# Altium PCB PCBFinalDesignCurrentMirror.PcbDoc
Units mm, origin at the board's own origin, x right, y up, seen from the top; angles counter-clockwise.
Board outline 44.45 x 53.21 mm, 4 copper layers (Top Layer, Layer 1, Layer 2, Bottom Layer), stack 0.603 mm thick; 36 components, 29 nets, 185 pads, 51 vias.
Unrouted connection lines stored in the file: 33.
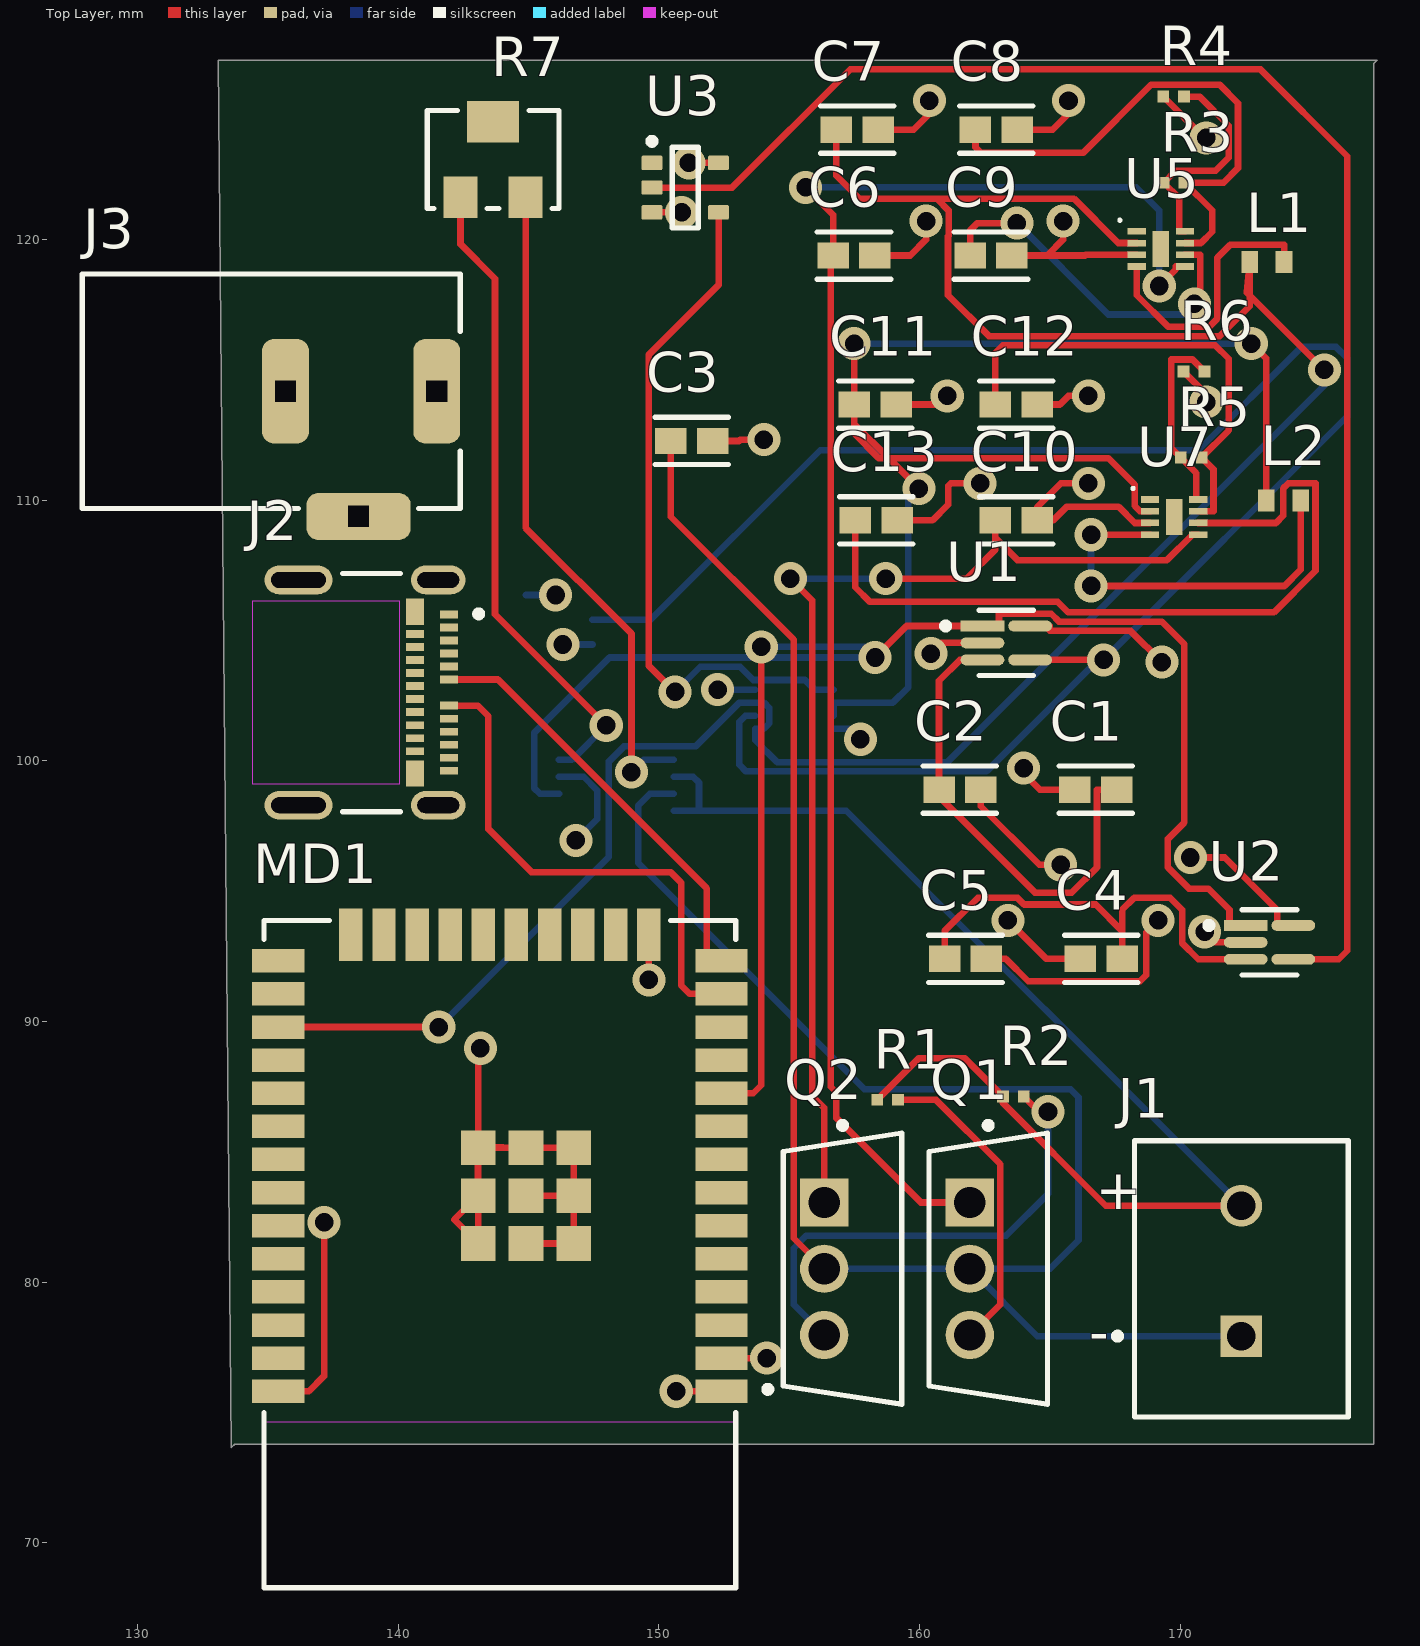
[diagram p0: Top Layer view]
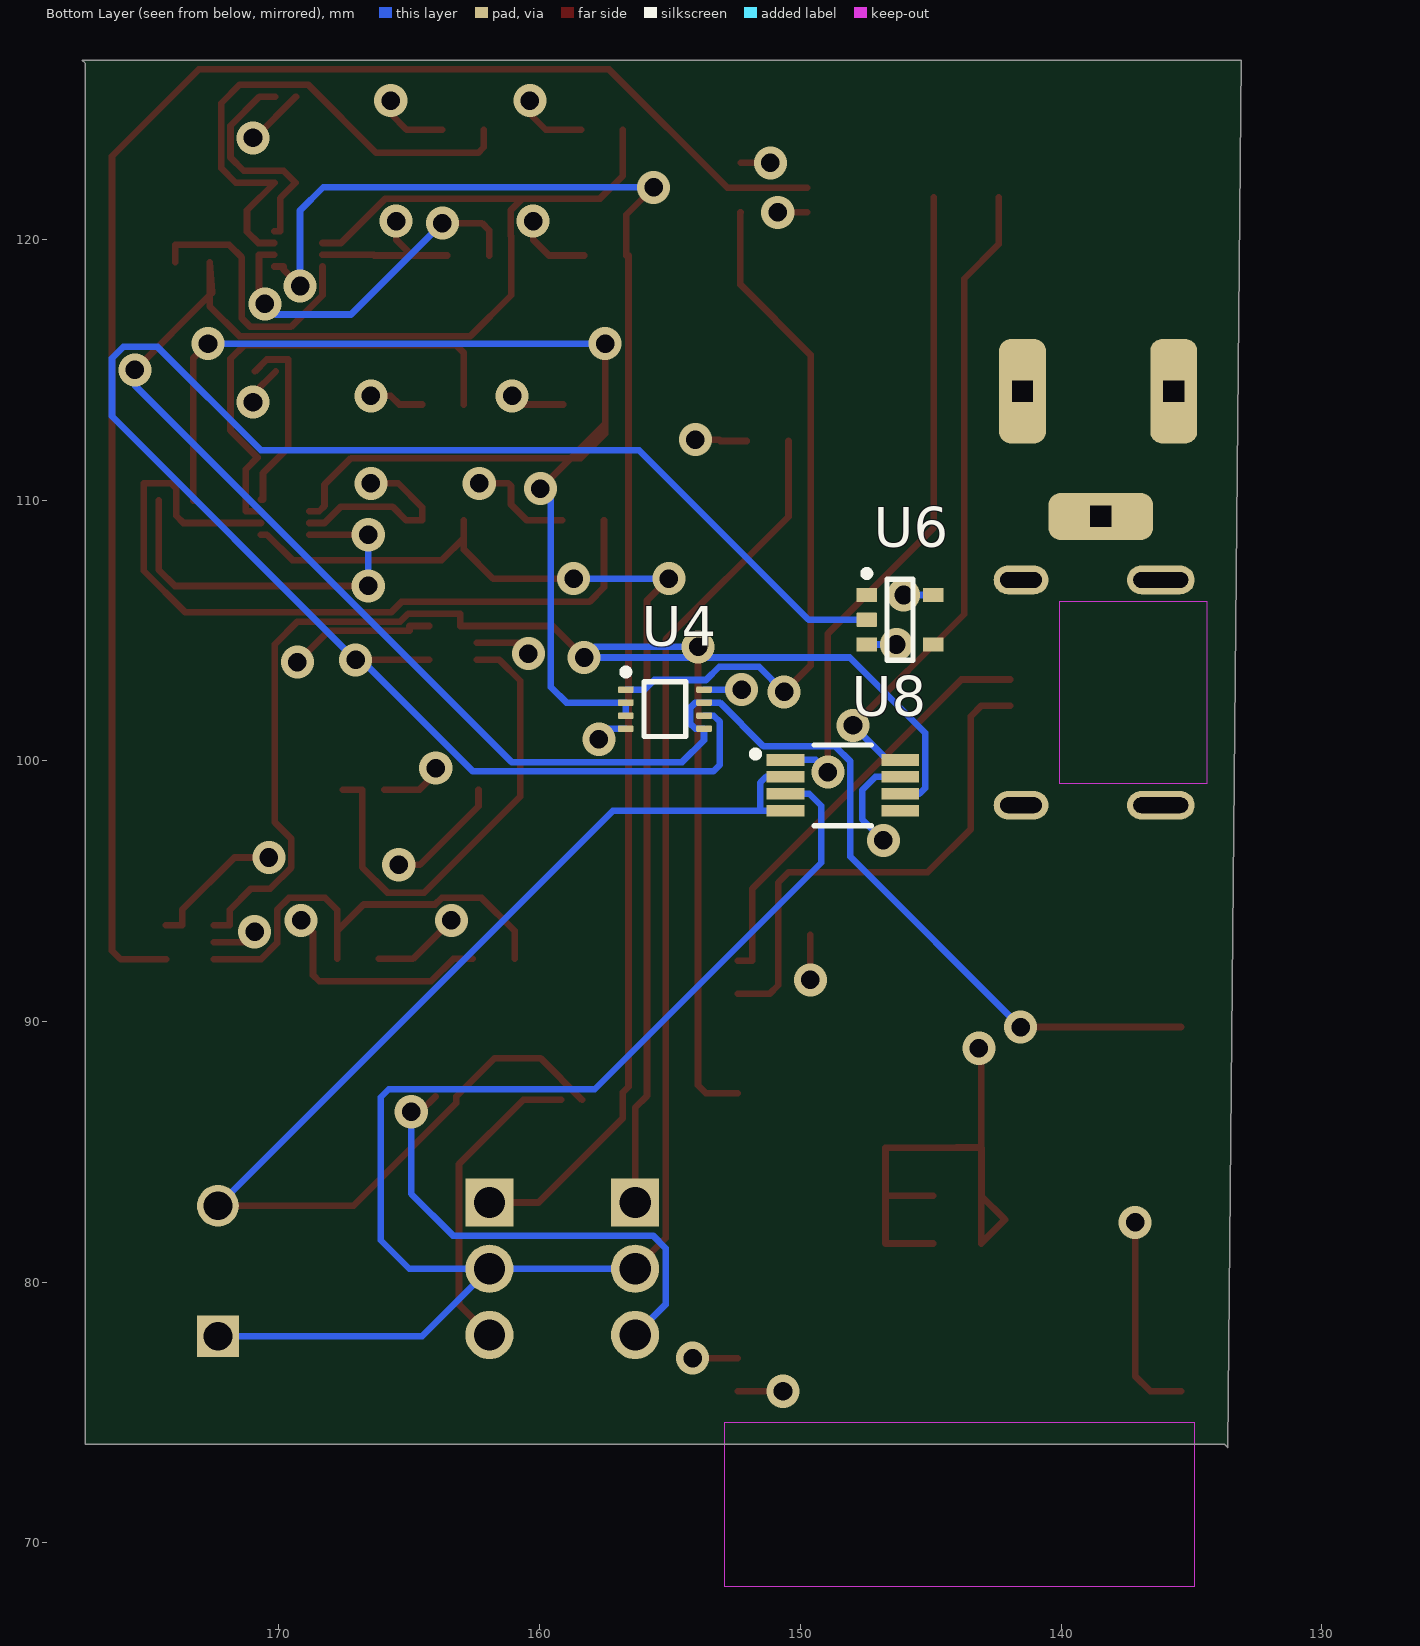
[diagram p1: Bottom Layer view, seen from below]
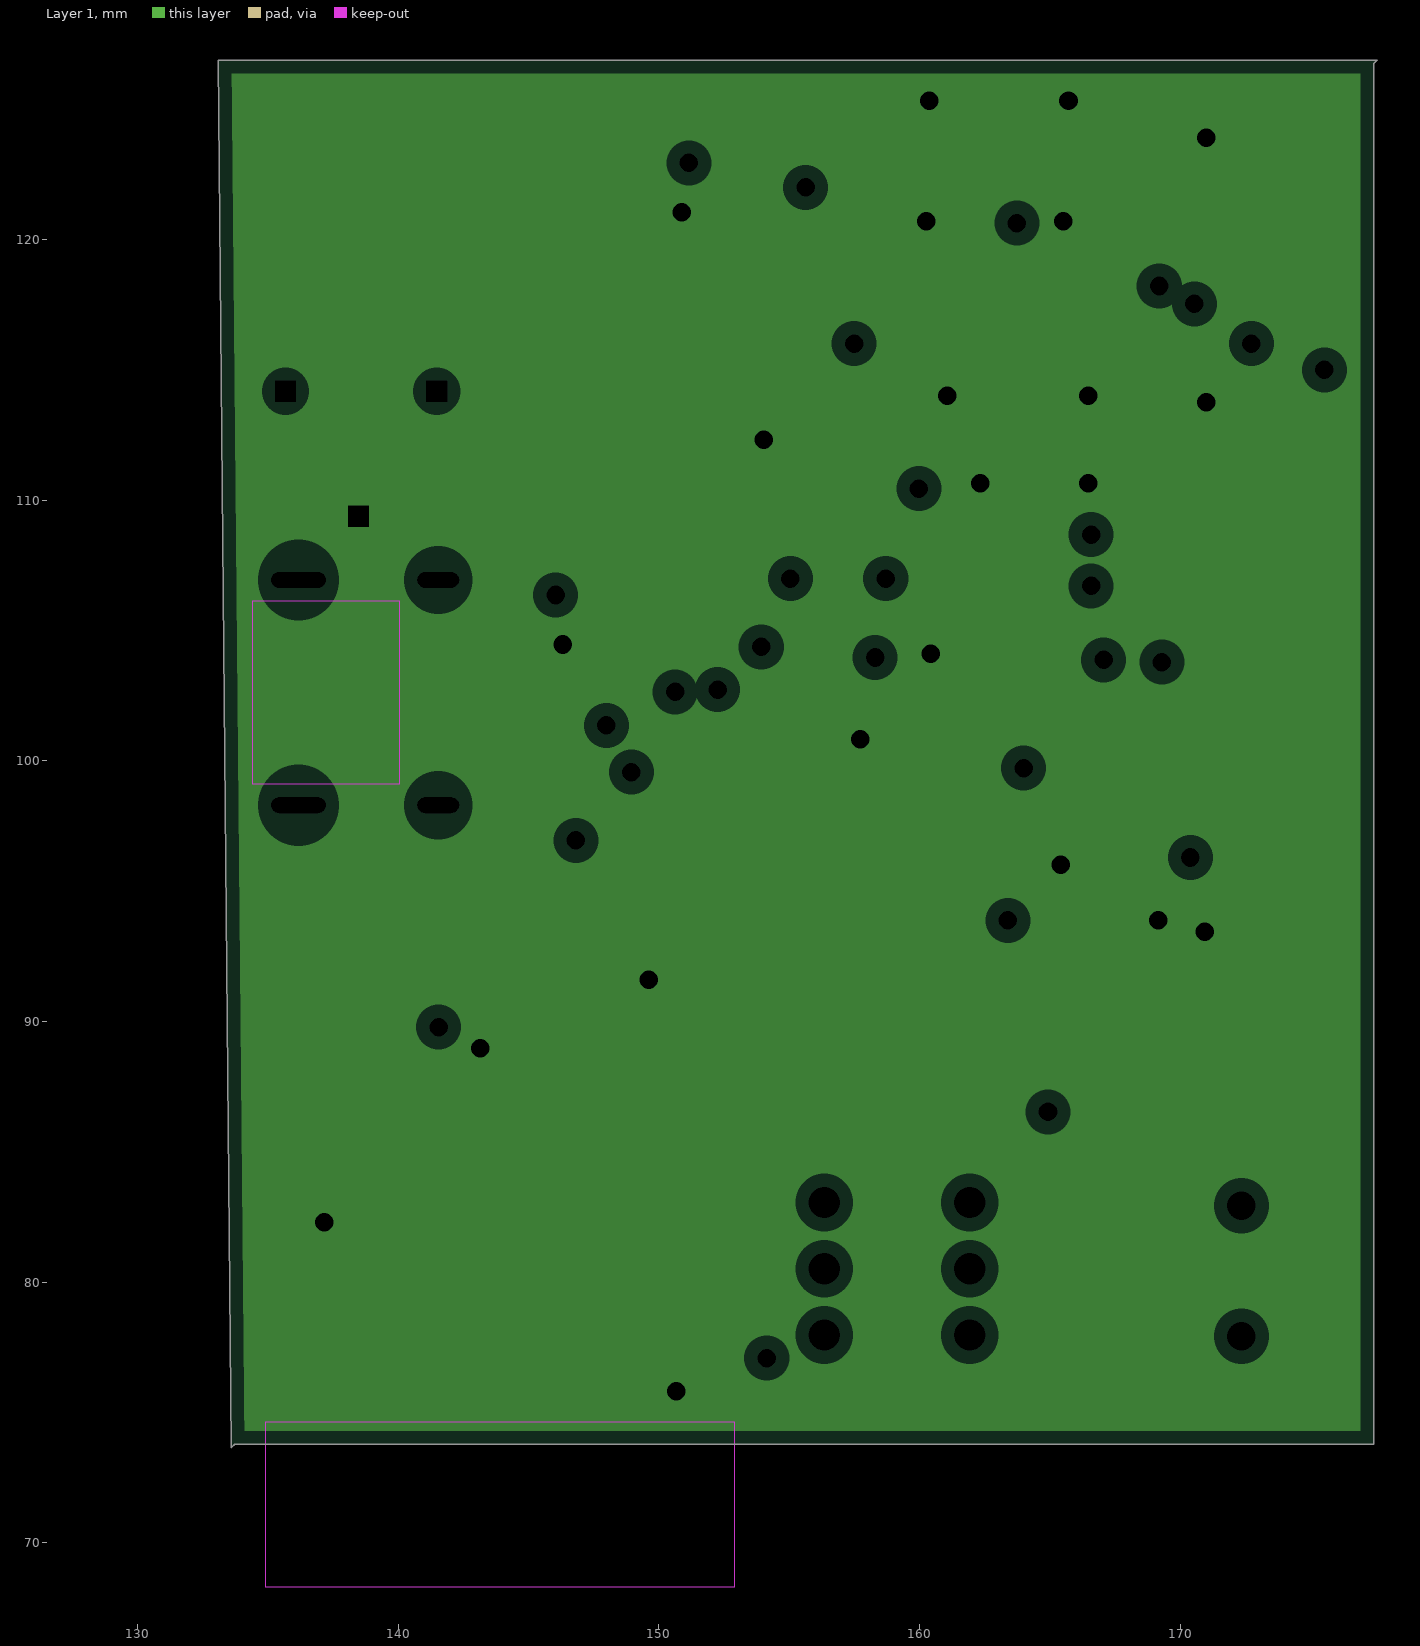
[diagram p2: Layer 1, clearances drawn from the general rule]
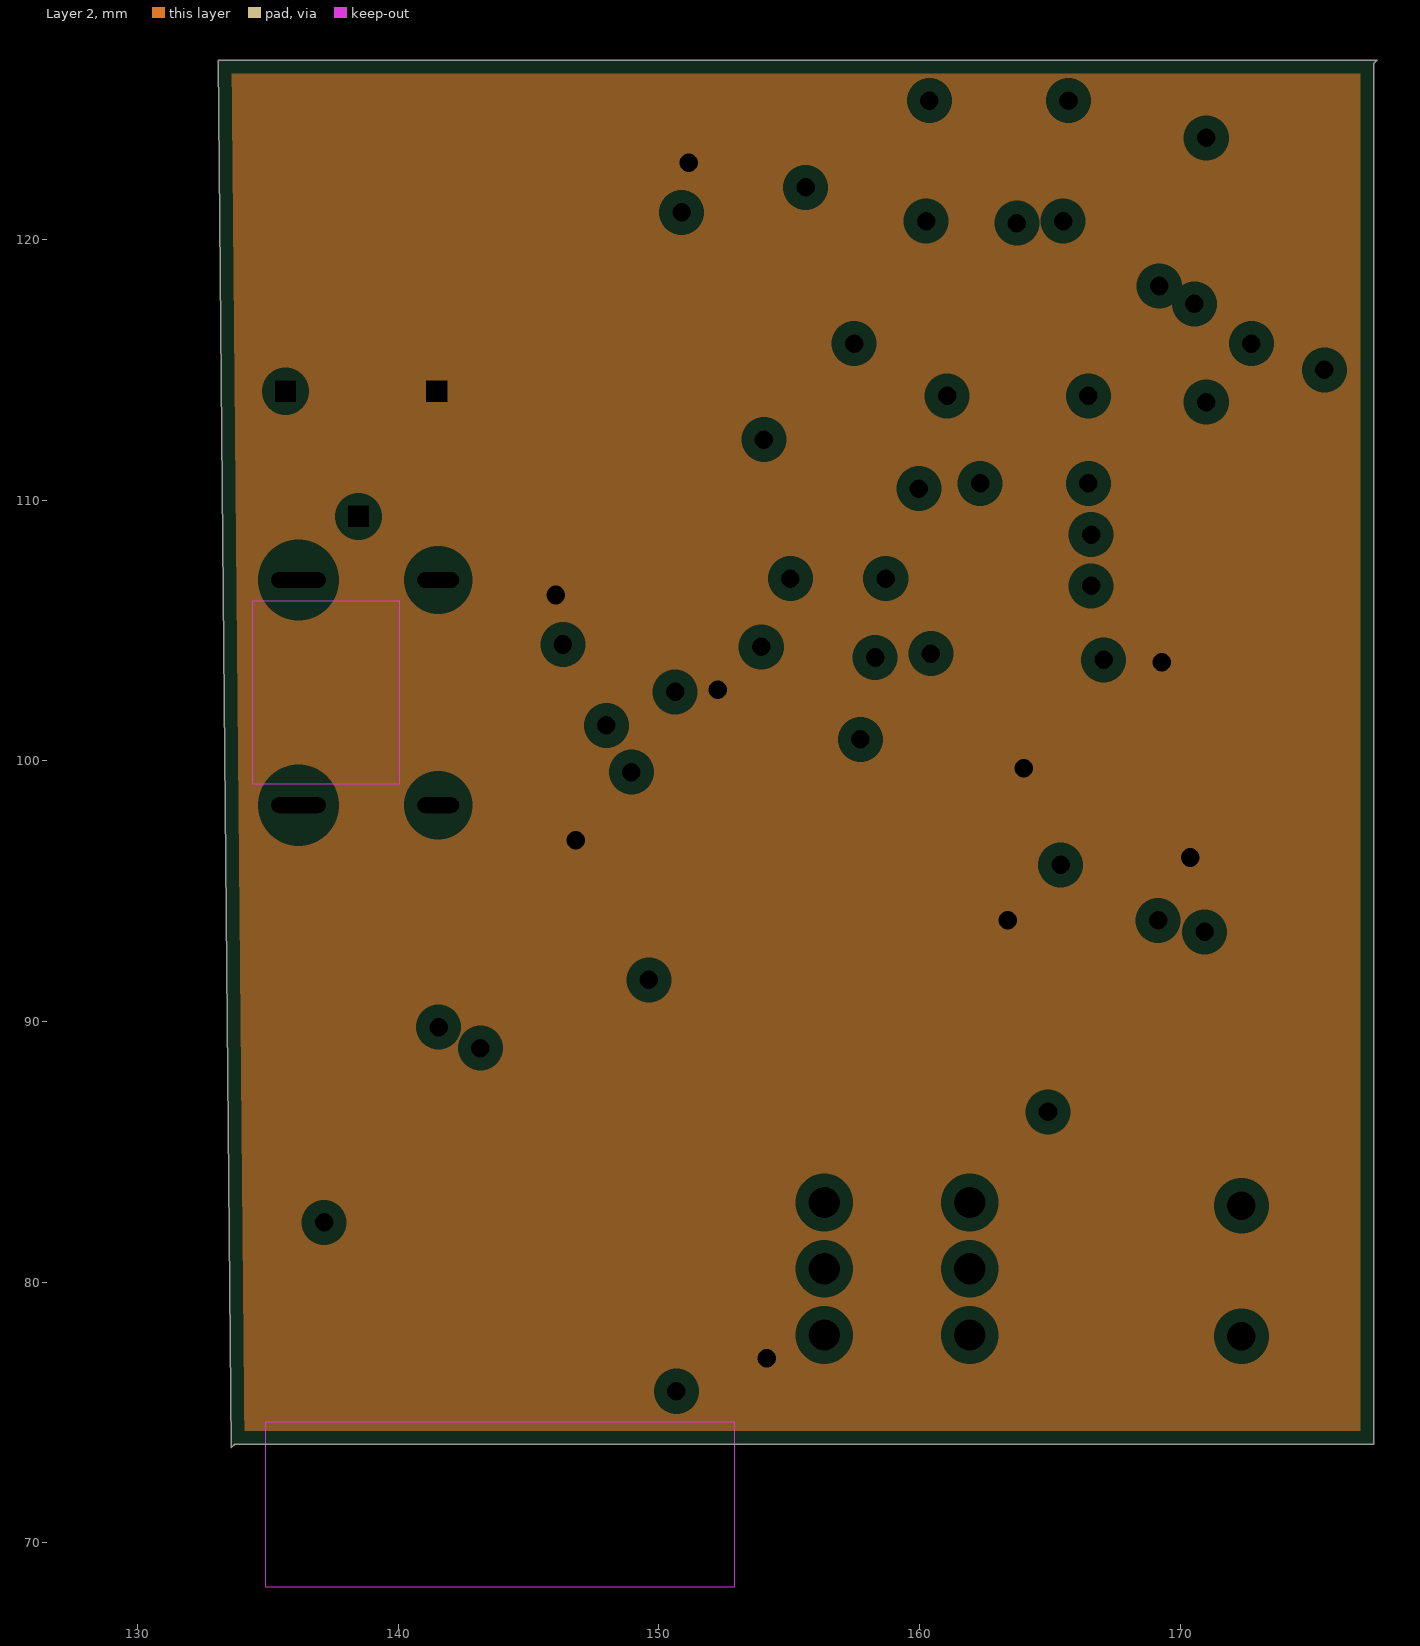
[diagram p3: Layer 2, clearances drawn from the general rule]
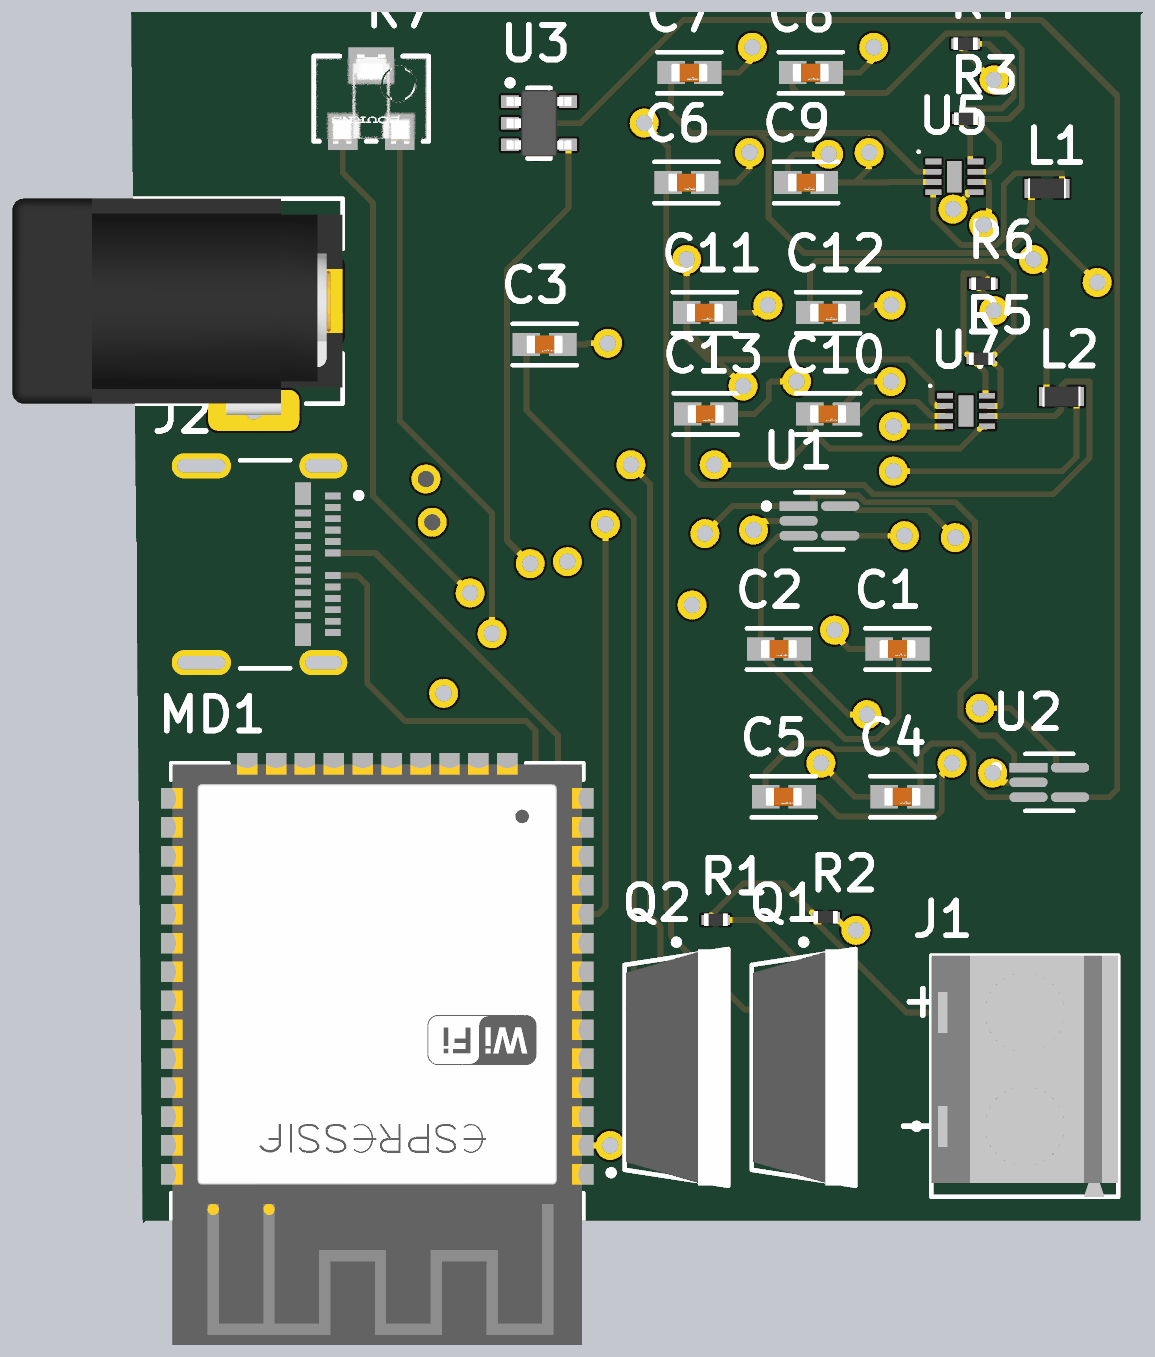
[diagram p4: 3D render of the assembled board from above, using the file's embedded part models]
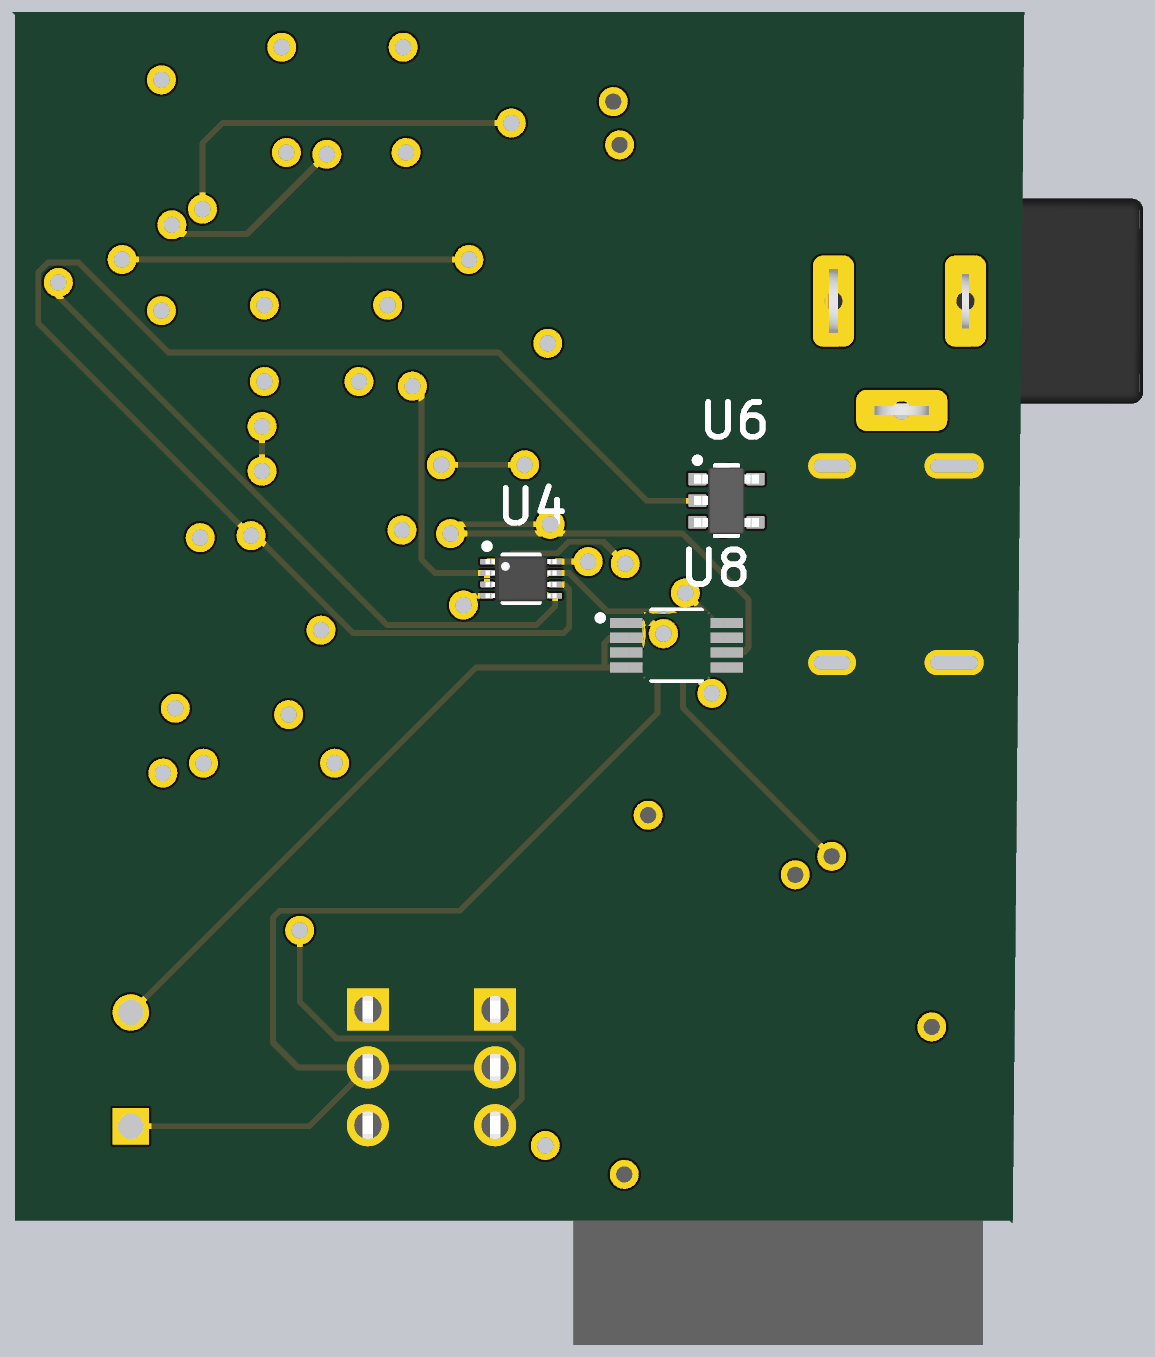
[diagram p5: 3D render of the assembled board from below, using the file's embedded part models]

## Layer stack, top to bottom
Top Solder: solder mask 0.0102, Solder Resist, Dk 3.5
Top Layer: signal copper 0.0356
Dielectric 2: prepreg 0.0711, PP-006, Dk 4.1
Layer 1: plane copper 0.035, net GND
Dielectric 1: dielectric 0.32, FR-4, Dk 4.8
Layer 2: plane copper 0.035, net VCC
Dielectric 3: prepreg 0.0711, PP-006, Dk 4.1
Bottom Layer: signal copper 0.0356
Bottom Solder: solder mask 0.0102, Solder Resist, Dk 3.5

## Board outline
133.604,73.66 133.731,73.787 177.419,73.787 177.419,126.746 177.546,126.873 133.096,126.873

## Design rules (kind name [scope] priority, off if disabled: settings)
Clearance [All] p1: gap=0.1 ignorepadtopadclearanceinfootprint=TRUE
PlaneClearance [All] p1: clearance=0.508
PlaneConnect [All] p1: planeconnectstyle=Relief reliefexpansion=0.508 reliefentries=4 reliefconductorwidth=0.254 reliefairgap=0.254
PolygonConnect [All] p1: connectstyle=Relief reliefconductorwidth=0.254 reliefentries=4 polygonreliefangle="90 Angle" airgapwidth=0.254
RoutingVias [All] p1: holewidth=0.711 width=1.27 viastyle="Through Hole" minholewidth=0.711 minwidth=1.27 maxholewidth=0.711 maxwidth=1.27
SolderMaskExpansion [All] p1: expansion=0.102 istentingtop=FALSE
SupplyNets "Schematic Supply Nets_14" [InNet('slow')] p1: voltage=0.000
SupplyNets "Schematic Supply Nets_13" [InNet('VCC')] p2: voltage=0.000
SupplyNets "Schematic Supply Nets_12" [InNet('D-')] p3: voltage=0.000
SupplyNets "Schematic Supply Nets_11" [InNet('nhigh')] p4: voltage=0.000
SupplyNets "Schematic Supply Nets_10" [InNet('-High')] p5: voltage=0.000
SupplyNets "Schematic Supply Nets_9" [InNet('High')] p6: voltage=0.000
SupplyNets "Schematic Supply Nets_8" [InNet('Low')] p7: voltage=0.000
SupplyNets "Schematic Supply Nets_7" [InNet('Vin-')] p8: voltage=0.000
SupplyNets "Schematic Supply Nets_6" [InNet('Vout')] p9: voltage=0.000
SupplyNets "Schematic Supply Nets_5" [InNet('shigh')] p10: voltage=0.000
SupplyNets "Schematic Supply Nets_4" [InNet('GND')] p11: voltage=0.000
SupplyNets "Schematic Supply Nets_3" [InNet('D+')] p12: voltage=0.000
SupplyNets "Schematic Supply Nets_2" [InNet('-Low')] p13: voltage=0.000
SupplyNets "Schematic Supply Nets_1" [InNet('Vin+')] p14: voltage=0.000
SupplyNets "Schematic Supply Nets" [InNet('nlow')] p15: voltage=0.000
Width [All] p1: maxlimit=0.254 minlimit=0.254 preferedwidth=0.254
28 further rules are at their usual default settings.

## Components (designator, comment, footprint, x,y, rotation, side; value= is the part's Value field where it differs from the comment)
C1 "1p" FP-GRM188-0_1-e0_2_0_55-IPC_A 166.751,98.893 r0 top
C2 "329p" FP-GRM188-0_1-e0_2_0_55-IPC_A 161.544,98.893 r0 top
C3 "1u" FP-GRM188-0_1-e0_2_0_55-IPC_A 151.257,112.268 r0 top
C4 "1p" FP-GRM188-0_1-e0_2_0_55-IPC_A 166.965,92.404 r0 top
C5 "3p" FP-GRM188-0_1-e0_2_0_55-IPC_A 161.758,92.404 r0 top
C6 "0.1p" FP-GRM188-0_1-e0_2_0_55-IPC_A 157.482,119.38 r0 top
C7 "2.2p" FP-GRM188-0_1-e0_2_0_55-IPC_A 157.609,124.206 r0 top
C8 "0.1p" FP-GRM188-0_1-e0_2_0_55-IPC_A 162.943,124.206 r0 top
C9 "0.1p" FP-GRM188-0_1-e0_2_0_55-IPC_A 162.736,119.38 r0 top
C10 "0.1p" FP-GRM188-0_1-e0_2_0_55-IPC_A 163.705,109.22 r0 top
C11 "2.2p" FP-GRM188-0_1-e0_2_0_55-IPC_A 158.291,113.665 r0 top
C12 "0.1p" FP-GRM188-0_1-e0_2_0_55-IPC_A 163.705,113.665 r0 top
C13 "0.1p" FP-GRM188-0_1-e0_2_0_55-IPC_A 158.331,109.22 r0 top
J1 "282836-2" TECO-282836-2_V 172.339,80.431 r90 top
J2 "1054500101" FP-1054500101-MFG 138.176,102.616 r270 top
J3 "694106301002" 694106301002 135.128,114.173 r270 top
L1 "B82496C3330J" INDC1608X90X30LL10T20 173.317,119.126 r0 top
L2 "B82496C3330J" INDC1608X90X30LL10T20 173.952,109.982 r0 top
MD1 "ESP32-WROOM-S3" FP-ESP32-WROOM-32D-MFG 143.9,81.079 r180 top
Q1 "IRL40B209" FP-PG-TO220-3-MFG 162.63,80.518 r0 top
Q2 "IRL40B209" FP-PG-TO220-3-MFG 157.042,80.518 r0 top
R1 "ERJ2GE0R00X" RESC1005X40X25LL05T05 158.769,86.995 r0 top
R2 "ERJ2GE0R00X" RESC1005X40X25LL05T05 163.595,87.122 r0 top
R3 "ERJ2GE0R00X" RESC1005X40X25LL05T05 169.761,122.174 r0 top
R4 "ERJ2GE0R00X" RESC1005X40X25LL05T05 169.742,125.476 r0 top
R5 "ERJ2GE0R00X" RESC1005X40X25LL05T05 170.415,111.633 r0 top
R6 "ERJ2GE0R00X" RESC1005X40X25LL05T05 170.523,114.935 r0 top
R7 "3224W-1-103E" FP-3224W-MFG 143.637,123.063 r90 top value=10kΩ
U1 "" FP-DCK0005A-IPC_A 163.322,104.521 r0 top
U2 "TLV3691IDCKR" FP-DCK0005A-IPC_A 173.418,93.036 r0 top
U3 "SN74AUP1G04DBVR" DBV0005A_L 151.008,121.986 r0 top
U4 "SN74AUP2G00DCUR" DCU0008A_L 155.194,101.981 r180 bottom
U5 "LT8410IDC" LT-DC8_V 169.253,119.634 r0 top
U6 "SN74AUP1G04DBVR" DBV0005A_L 146.177,105.41 r180 bottom
U7 "LT8410IDC" LT-DC8_V 169.761,109.347 r0 top
U8 "INA333AIDGKT" FP-DGK0008A-MFG 148.369,99.06 r180 bottom

## Footprints (in the part's own frame and the unit in brackets; to place one, negate y for a bottom-side part, rotate by r counter-clockwise, add the part's x,y. Pads: shape width x height; smd on the part's side, far side on the other; paste and mask are expansions set on the pad)
694106301002 [mm] "DC Power Jack Right Angled(6.4)"
  rrect50% 4x1.8 hole 0.8 square: 1(0,6.35) 2(0,0.55)
  rrect50% 1.8x4 hole 0.8 square: 3(4.8,3.35)
  silkscreen extent -4.5,-7.25 4.5,7.25, body extent -4.5,-7.25 5,7.25, height 10.75
DBV0005A_L [mm] "SOT23, 5-Leads, Body 3.05x1.75mm, Pitch 0.95mm, IPC High Density"
  rrect18% 0.8x0.55 smd: 1(-1.275,0.95) 2(-1.275,0) 3(-1.275,-0.95) 4(1.275,-0.95) 5(1.275,0.95)
  silkscreen extent -1.4,-1.55 0.5,1.9, body extent -1.42,-1.46 1.42,1.46, height 1.08
DCU0008A_L [mm] "SOP, 8-Leads, Body 2.4x2.1mm, Pitch 0.5mm, IPC High Density"
  rrect40% 0.6x0.25 smd: 1(-1.5,0.75) 2(-1.5,0.25) 3(-1.5,-0.25) 4(-1.5,-0.75) 5(1.5,-0.75) 6(1.5,-0.25) 7(1.5,0.25) 8(1.5,0.75)
  silkscreen extent -1.63,-1.05 0.8,1.55, body extent -1.56,-1 1.56,1, height 0.9
FP-3224W-MFG [mm]
  rect 1.6x1.3 smd paste+0 mask+0: 1(-1.45,1.25) 3(-1.45,-1.25)
  rect 1.6x2 smd paste+0 mask+0: 2(1.45,0)
  silkscreen extent -1.87,-2.53 1.87,2.53, body extent -1.99,-2.41 1.96,2.41, height 5.31
FP-1054500101-MFG [mm]
  rrect100% 1.1x2.1 hole 1.6 slot 0.6 at 0 deg paste-2539.97 mask+0: 1(-4.32,3.36) 2(4.32,3.36)
  rrect100% 1.1x2.6 hole 2.1 slot 0.6 at 0 deg paste-2539.97 mask+0: 3(-4.32,-2) 4(4.32,-2)
  rect 0.3x0.7 smd paste+0 mask+0: A1(-3,3.77) A2(-2.5,3.77) A3(-2,3.77) A4(-1.5,3.77) A5(-1,3.77) A6(-0.5,3.77) A7(0.5,3.77) A8(1,3.77) A9(1.5,3.77) A10(2,3.77) A11(2.5,3.77) A12(3,3.77) B2(2.25,2.47) B3(1.75,2.47) B4(1.25,2.47) B5(0.75,2.47) B6(0.25,2.47) B7(-0.25,2.47) B8(-0.75,2.47) B9(-1.25,2.47) B10(-1.75,2.47) B11(-2.25,2.47)
  rect 1x0.7 smd paste+0 mask+0: B1(3.1,2.47) B12(-3.1,2.47)
  Keep-Out Layer region: -3.5,-3.771 3.5,-3.771 3.5,1.879 -3.5,1.879
  silkscreen extent -4.57,-0.3 4.57,5.04
FP-DCK0005A-IPC_A [mm]
  rect 1.677x0.416 smd paste+0 mask+0: 1(-0.914,0.65)
  rrect100% 1.677x0.416 smd paste+0 mask+0: 2(-0.914,0) 3(-0.914,-0.65) 4(0.914,-0.65) 5(0.914,0.65)
  silkscreen extent -2.45,-1.25 1.05,1.25
FP-DGK0008A-MFG [mm]
  rect 1.45x0.45 smd paste+0 mask+0: 1(-2.2,0.975) 2(-2.2,0.325) 3(-2.2,-0.325) 4(-2.2,-0.975) 5(2.2,-0.975) 6(2.2,-0.325) 7(2.2,0.325) 8(2.2,0.975)
  silkscreen extent -3.48,-1.55 1.1,1.55, body extent -2.45,-1.5 2.45,1.5, height 1.1
FP-ESP32-WROOM-32D-MFG [mm]
  rect 2x0.9 smd paste+0 mask+0: 1(-8.5,5.26) 2(-8.5,3.99) 3(-8.5,2.72) 4(-8.5,1.45) 5(-8.5,0.18) 6(-8.5,-1.09) 7(-8.5,-2.36) 8(-8.5,-3.63) 9(-8.5,-4.9) 10(-8.5,-6.17) 11(-8.5,-7.44) 12(-8.5,-8.71) 13(-8.5,-9.98) 14(-8.5,-11.25) 25(8.5,-11.25) 26(8.5,-9.98) 27(8.5,-8.71) 28(8.5,-7.44) 29(8.5,-6.17) 30(8.5,-4.9) 31(8.5,-3.63) 32(8.5,-2.36) 33(8.5,-1.09) 34(8.5,0.18) 35(8.5,1.45) 36(8.5,2.72) 37(8.5,3.99) 38(8.5,5.26)
  rect 0.9x2 smd paste+0 mask+0: 15(-5.715,-12.25) 16(-4.445,-12.25) 17(-3.175,-12.25) 18(-1.905,-12.25) 19(-0.635,-12.25) 20(0.635,-12.25) 21(1.905,-12.25) 22(3.175,-12.25) 23(4.445,-12.25) 24(5.715,-12.25)
  rect 1.33x1.33 smd paste+0 mask+0: 39(-2.835,-0.405) 39(-2.835,-4.075) 39(-2.835,-2.24) 39(-1,-0.405) 39(-1,-2.24) 39(-1,-4.075) 39(0.835,-0.405) 39(0.835,-2.24) 39(0.835,-4.075)
  Keep-Out Layer region: -9,6.45 9,6.45 9,12.75 -9,12.75
  Keep-Out Layer region: -9,6.45 9,6.45 9,12.75 -9,12.75
  silkscreen extent -10.4,-12.8 9.05,12.8, body extent -9,-12.75 9,12.75, height 3.2
FP-GRM188-0_1-e0_2_0_55-IPC_A [mm]
  rect 1.208x1.012 smd paste+0 mask+0: 1(-0.802,0) 2(0.802,0)
  silkscreen extent -1.41,-0.91 1.41,0.91, body extent -1.91,-1.01 1.91,1.01, height 0.25
FP-PG-TO220-3-MFG [mm]
  rect 1.85x1.85 hole 1.2 paste-2539.97 mask+0: 1(-0.705,2.54)
  round 1.85 hole 1.2 paste-2539.97 mask+0: 2(-0.705,0) 3(-0.705,-2.54)
  silkscreen extent -2.27,-5.2 2.27,5.62, body extent -2.37,-5.55 2.37,5.55, height 0.25
INDC1608X90X30LL10T20 [mm] "Chip Inductor, 2-Leads, Body 1.7x0.9mm, IPC High Density"
  rect 0.64x0.84 smd: 1(-0.66,0) 2(0.66,0)
  body extent -0.85,-0.45 0.85,0.45, height 0.9
LT-DC8_V [mm] "SON, 8-Leads, Body 2x2mm, Pitch 0.45mm, Thermal Pad 1.37x0.64mm, Recommended"
  rect 0.7x0.25 smd: 1(-0.925,0.675)
  rect 0.7x0.25 smd mask+0.102: 2(-0.925,0.225) 3(-0.925,-0.225) 4(-0.925,-0.675) 5(0.925,-0.675) 6(0.925,-0.225) 7(0.925,0.225) 8(0.925,0.675)
  rect 0.64x1.37 smd mask+0.102: 9(0,0)
  silkscreen extent -1.62,1.05 -1.52,1.15, body extent -1,-1 1,1, height 0.8
RESC1005X40X25LL05T05 [mm] "Chip Resistor, 2-Leads, Body 1.05x0.55mm, IPC High Density"
  rect 0.45x0.45 smd: 1(-0.4,0) 2(0.4,0)
  body extent -0.53,-0.28 0.53,0.28, height 0.4
TECO-282836-2_V [mm] "Female Header, Pitch 5mm, 1 x 2 Position, Height 10mm"
  rect 1.6x1.6 hole 1.1: 1(-2.5,0)
  round 1.6 hole 1.1: 2(2.5,0)
  silkscreen extent -5.6,-4.1 5,4.87, body extent -5.6,-4.1 5,4.1, height 10

## Part data
C1 C2 C3 C4 C5 C6 C7 C8 C9 C10 C11 C12 C13: library part CMP-2006-02792-2, "Chip Multilayer Ceramic Capacitors for General Purpose, 0603, 10uF, X5R, 15%, 20%, 6.3V", Capacitance=10uF, Case Code (Imperial)=0603, Case Code (Metric)=1608, Dielectric=X5R, Max Operating Temperature=85°C, Min Operating Temperature=-55°C, Package Quantity=4000, Tolerance=20%, Voltage=6.3V, Case/Package=0603, Depth=0.8mm, Height=0.8mm, Lead Free="Lead Free", Length=1.6mm, Material=Ceramic, Mount="Surface Mount", Packaging="Tape and Reel", Radiation Hardening=No, REACH SVHC="No SVHC", Termination=SMD/SMT, Thickness=0.035inch, Voltage Rating=6.3V, Voltage Rating (DC)=6.3V, Width=0.031inch
J1: library part CMP-1684-00017-1, "Female Header, Pitch 5 mm, 1 x 2 Position, Height 10 mm, Tail Length 3.5 mm, Rohs, Bulk", Color=Green, Current=13.5A, Manufacturer="TE Connectivity", Package Description="Female Header, Pitch 5 mm, 1 x 2 Position, Height 10 mm, Tail Length 3.5 mm", Package Reference=THD, Standard Package=300, Voltage=300V, 3D Model=282836-2.pdf, Category=Connectors,Interconnects, Clamp Material - Plating=Brass-NickelPlated, Contact Material - Plating=Brass-TinPlated, Datasheet URL=http://www.te.com.cn/commerce/DocumentDelivery/DDEController?Action=showdoc&DocId=Catalog+Section%7F1308389_EUROSTYLE_TERMINAL_BLOCKS%7F0607%7Fpdf%7FEnglish%7FENG_CS_1308389_EUROSTYLE_TERMINAL_BLOCKS_0607.pdf%7F282836-2, Dynamic Catalog=BuchananSeries, Family=TerminalBlocks-WiretoBoard, Featured Product=EurostyleTerminalBlockConnectors, Features=Interlocking(Side), Housing Material=Polyamide(PA66),Nylon6/6, Manufacturer URL=http://www.te.com, Mating Orientation=HorizontalwithBoard, Mounting Type=ThroughHole, Number of Levels=1, Other Names="5ULV-02B / A98076", Packaging=Bulk, Pitch="0.197\"(5.00mm)", Positions Per Level=2, Product Training Modules=Wire-to-BoardEurostyleTerminalBlocks, RoHS Information=282836-2StatementofCompliance, Screw Material - Plating=Brass-NickelPlated, Screw Thread=M3, Series=Buchanan, Torque - Screw=0.68Nm(6Lb-In), Wire Gauge=16-30AWG, Wire Termination=Screw-RisingCageClamp
J2: library part CMP-04767-000004-1, "CONN RCP USB3.1 TYPEC 24P SMD RA", Current Rating=0.25/1.25/5A, Manufacturer=Molex, Package=0, Temperature="-30°C to +85°C", Temperature Range High=+85°C, Temperature Range Low=-30°C, Voltage Rating=30V, Automotive=No, Category=Conn, ComponentLink2Description=Datasheet, ComponentLink2URL=https://www.molex.com/webdocs/datasheets/pdf/en-us/1054500101_IO_CONNECTORS.pdf, Conn Orientation="Right Angle", Contact Material=Gold,Nickel, Device Class L1=Connectors, Device Class L2="USB Connectors", Device Class L3=unset, Digikey Description="CONN RCP USB3.1 TYPEC 24P SMD RA", Footprint Url=https://www.molex.com/pdm_docs/sd/1054500101_sd.pdf, Height=3.44mm, Is Female=yes, Lead Free=Yes, Manufacturer Part Number=1054500101, Mouser Description="USB Shielded I/O Receptacle; Type C; Right Angle; Surface Mount; Gold over Nickel", Number Of Contacts=24, Octopart=https://octopart.com/105450-0101-molex-68082325, Pitch=0.5mm, RoHS=TRUE, Shielding=true, Usb Standard="USB 3.1"
J3: library part CMP-1502-00188-2, Color=Black, Current Rating=5A, Flammability Rating="UL94 V-0", Insulation Resistance=100MΩ, Max Operating Temperature=85°C, Min Operating Temperature=-40°C, Operating Supply Voltage=24V, Voltage Rating (DC)=20V, Connector Type=Power, Contact Gender=Female, Contact Material="Gold, Tin", Contact Plating=Tin, Gender=Male, Height=11mm, Housing Material=Polyamide, Mount="Through Hole", NexarPartId=52676100, Number Of Contacts=3, Packaging=Bulk, REACH SVHC=Unknown, RoHS=Compliant, Shielding=Unshielded, Termination="Through Hole", Voltage Rating=24V
L1 L2: library part CMP-2000-05913-1, "Unshielded Wirewound Inductor, 33 nH, 350 mA, -55 to 150 degC, 0603 (1608 Metric), RoHS, Tape and Reel", Current - Saturation=-, Current Rating=350mA, DC Resistance (DCR)=600mOhmMax, Frequency - Self Resonant=3GHz, Frequency - Test=100MHz, Inductance=33nH, Manufacturer=EPCOS-(TDK), Package / Case=0603(1608Metric), Package Description="2-Pin Surface Mount Device, Body 1.6 x 0.8 mm", Package Reference=0603, Q @ Freq=14@100MHz, Ratings=AEC-Q200, Tolerance=±5%, Category=Inductors,Coils,Chokes, Datasheet URL=https://en.tdk.eu/inf/30/db/ind_2008/b82496c.pdf, Datasheet Version=07/2016, Family=FixedInductors, Height - Seated (Max)="0.035\"(0.90mm)", Manufacturer URL=http://www.tdk.com/, Material - Core=Ceramic, Mounting Technology=SurfaceMount, Mounting Type=SurfaceMount, Operating Temperature=-, Packaging=CutTape(CT), Series=SIMID, Shielding=Unshielded, Size / Dimension="0.063\"Lx0.031\"W(1.60mmx0.80mm)", Type=Wirewound
MD1: library part CMP-194065-000003-1, "WIFI MODULE 32MBITS SPI FLASH", Manufacturer="Espressif Systems", Manufacturer Part Number=ESP32-WROOM-32D, Max Frequency=2484MHz, Max Supply Voltage=3.6V, Min Supply Voltage=3V, Nominal Supply Current=500mA, Temperature="-40°C to +85°C", Temperature Range High=+85°C, Temperature Range Low=-40°C, Automotive=No, Bandwidth=72MHz, Category=UNK, ComponentLink2Description=Datasheet, ComponentLink2URL=https://www.espressif.com/sites/default/files/documentation/esp32-wroom-32d_esp32-wroom-32u_datasheet_en.pdf, Data Rate=150Mbits/s, Device Class L1="Integrated Circuits (ICs)", Device Class L2="RF Semiconductors and Devices", Device Class L3=Transceivers, Digikey Description="WIFI MODULE 32MBITS SPI FLASH", Height=3.2mm, Interface=I2C,SPI,UART,Ethernet,I2S,Other, Lead Free=Yes, Mouser Description="Wi-Fi/BT BLE Module ESP32-D0WD, SPI Flash, UART, P", Number Of Adc Channels=16, Number Of Gpio=32, Octopart=https://octopart.com/esp32-wroom-32d-espressif+systems-91040050, Package=ESP32-WROOM-32D, RoHS=TRUE, Sensitivity=-98dBm
Q1 Q2: library part CMP-32901-000691-1, "MOSFET N-CH 40V 195A", Case/Package=TO-220, Continuous Drain Current (ID)=195A, Drain to Source Voltage (Vdss)=40V, Input Capacitance=15.14nF, Max Operating Temperature=175°C, Max Power Dissipation=375W, Min Operating Temperature=-55°C, Threshold Voltage=2.4V, Halogen Free="Halogen Free", Lead Free="Lead Free", Max Dual Supply Voltage=40V, Mount="Through Hole", Number of Pins=3, Packaging=Rail/Tube, Rds On Max=1.25mR, RoHS Compliant=Yes, Series="HEXFET®, StrongIRFET™"
R1 R2 R3 R4 R5 R6: library part CMP-2000-07451-1, "Chip Resistor, 0 Ohm, 0.1 W, -55 to 155 degC, 0402 (1005 Metric), RoHS, Tape and Reel", Case Code (Imperial)=0402, Case Code (Metric)=1005, Manufacturer=Panasonic, Max Operating Temperature=155degC, Max Power Dissipation=100mW, Min Operating Temperature=-55degC, Package Description="2-Pin Surface Mount Device, Body 1 x 0.5 mm", Package Quantity=1, Package Reference=402, Resistance=0mOhm, Temperature Coefficient=600ppm/��C, Tolerance=5%, Voltage Rating=50V, Case/Package=0402, Composition=ThickFilm, Contact Plating=Tin, Datasheet URL=https://industrial.panasonic.com/cdbs/www-data/pdf/RDA0000/AOA0000C301.pdf, Datasheet Version=03/2015, Depth=0.5mm, Height=0.35mm, Lead Free=LeadFree, Length=1mm, Manufacturer URL=http://www.panasonic.com/, Military Standard=Not, Mount=SurfaceMount, Mounting Technology=SurfaceMount, Number of Terminations=2, Packaging=TapeandReel, Power Rating=100mW, Radiation Hardening=No, REACH SVHC=NoSVHC, RoHSCompliant=True, Termination=SMD/SMT, Voltage Rating (DC)=50V, Width=0.02inch
R7: library part CMP-2000-05077-2, "TRIMMER 10K OHM 0.25W J LEAD TOP", Manufacturer=Bourns, Package=3224W, Power Rating=250mW, Resistance=10kΩ, Temperature="-65°C to +150°C", Temperature Coefficient=100ppm/°C, Temperature Range High=+150°C, Temperature Range Low=-65°C, Tolerance=10%, Voltage Rating=300V, Automotive=No, Category=Res, ComponentLink2Description=Datasheet, ComponentLink2URL=https://upverter.com/datasheet/a166fca85da25564670351d2dc712345c058bc40.pdf, Composition=Cermet, Device Class L1="Passive Components", Device Class L2=Resistors, Device Class L3="Variable Resistors and Potentiometers", Digikey Description="TRIMMER 10K OHM 0.25W J LEAD TOP", Height=5.55mm, Lead Free=Yes, Manufacturer Part Number=3224W-1-103E, Mouser Description="Trimmer Resistors - SMD 4mm 10Kohms 10% Square Cermet Sealed", Octopart=https://octopart.com/3224w-1-103e-bourns-14818, RoHS=TRUE, Series=3224, Standoff Height=0.2mm
U1 U2: library part CMP-04896-000044-1, "IC COMPARATOR NANO-POWER SC70-5", Case/Package=SC, Input Bias Current=100pA, Input Offset Voltage (Vos)=3mV, Max Dual Supply Voltage=3.25V, Max Operating Temperature=125°C, Max Supply Voltage=6.5V, Min Dual Supply Voltage=450mV, Min Operating Temperature=-40°C, Min Supply Voltage=900mV, Output Current=42mA, Package Quantity=3000, Quiescent Current=150nA, Contact Plating=Gold, Lead Free="Lead Free", Max Input Current=100pA, Mount="Surface Mount", Number of Channels=1, Number of Elements=1, Number of Pins=5, Packaging="Tape and Reel", Propagation Delay=35us, Radiation Hardening=No, Response Time=24us, RoHS Compliant=Yes, Type="General Purpose"
U3 U6: library part CMP-0859-00103-3, "Low-Power Single Inverter Gate, DBV0005A, LARGE T&R", F @ Nom Voltage(Max)(Mhz)=100, Generic Part Number=SN74AUP1G04, ICC @ Nom Voltage(Max)(mA)=0.0009, Manufacturer="Texas Instruments", Operating Temperature Range(C)="-40 to 85", Rating=Catalog, tpd @ Nom Voltage(Max)(ns)=25.4,16,10.8,9.2,6.5,5.4, Voltage(Nom)(V)=0.8,1.2,1.5,1.8,2.5,3.3, 3-State Output=No, Bits(#)=1, DatasheetVersion=SCES571K, Input Type=CMOS, Logic=Inverting, Output Drive (IOL/IOH)(Max)(mA)=20/-20, Output Type=CMOS, PackageReference=DBV0005A, Schmitt Trigger=No, Sub-Family="Inverting Buffer/Driver", Technology Family=AUP, VCC(Max)(V)=3.6, VCC(Min)(V)=0.8
U4: library part CMP-0859-00590-3, "Low-Power Dual 2-Input Positive-NAND Gate, DCU0008A, LARGE T&R", F @ Nom Voltage(Max)(Mhz)=100, Generic Part Number=SN74AUP2G00, ICC @ Nom Voltage(Max)(mA)=0.0009, Manufacturer="Texas Instruments", Operating Temperature Range(C)="-40 to 85", Rating=Catalog, tpd @ Nom Voltage(Max)(ns)=31.8,26.3,16.6,12.9,8.8,6.7, Voltage(Nom)(V)=0.8,1.2,1.5,1.8,2.5,3.3, 3-State Output=No, Bits(#)=2, DatasheetVersion=SCES752C, Gate Type=NAND, Input Type=CMOS, Logic=True, Output Drive (IOL/IOH)(Max)(mA)=20/-20, Output Type=CMOS, PackageReference=DCU0008A, Schmitt Trigger=No, Sub-Family="NAND Gate", Technology Family=AUP, VCC(Max)(V)=3.6, VCC(Min)(V)=0.8
U5 U7: library part CMP-0491-00021-1, "Ultralow Power Boost Converter with Output Disconnect, 8-pin SON (DC8), -40 to 125 degC, Pb-Free, Mini Tape and Reel", Manufacturer="Linear Technology", PartNumber=LT8410IDC-1#TRMPBF, ComponentLink1Description="Manufacturer URL", ComponentLink1URL=http://www.linear.com/, ComponentLink2Description=Datasheet, ComponentLink2URL=http://cds.linear.com/docs/en/datasheet/84101fb.pdf, ComponentLink3Description="Package Specification", ComponentLink3URL=http://cds.linear.com/docs/en/packaging/DFN_8_05-08-1719.pdf, DatasheetVersion="Rev. B", Mounting Technology="Surface Mount", Number of Outputs=1, PackageDescription="8-Pin Plastic DFN, Body 2 x 2 mm, Pitch 0.45 mm", PackageReference=DC8, PackageVersion="Rev. A, 04/2009", Packing="Mini Tape and Reel", RoHS=TRUE
U8: library part CMP-0944-00090-3, "IC INST AMP 1 CIRCUIT 8VSSOP", Ambient Temperature Range High=+125°C, Ambient Temperature Range Low=-40°C, Input Bias Current=0.00007uA, Input Offset Voltage=0.010-0.025mV, Manufacturer="Texas Instruments", Max Dual Supply Voltage=2.75V, Max Junction Temp=+150°C, Max Supply Voltage=5.5V, Min Dual Supply Voltage=0.9V, Min Supply Voltage=1.8V, Nominal Supply Current=50uA, Package=DGK0008A, Temperature="-40°C to +125°C", Voltage Gain=0.001-1V/mV, Automotive=No, Bandwidth=150kHz, Category=IC, Ciiva Ids=1154636, ComponentLink2Description=Datasheet, ComponentLink2URL=http://www.ti.com/lit/ds/symlink/ina333.pdf, Device Class L1="Integrated Circuits (ICs)", Device Class L2="Linear ICs", Device Class L3=Instrumentation, Digikey Description="IC INST AMP 1 CIRCUIT 8VSSOP", Height=1.1mm, Import Ts=1521844208, Lead Free=Yes, Manufacturer Part Number=INA333AIDGKT, Mouser Description="Instrumentation Amplifiers Lo Pwr Prec Inst Amp", Number of Channels=1, Octopart=https://octopart.com/ina333aidgkt-texas+instruments-8315938, Release Date=1464176905, RoHS=TRUE, Standoff Height=0.05mm, Temperature Range High=+125°C, Temperature Range Low=-40°C

## Via types
v1: diameter 1.27, hole 0.711, Top Layer to Bottom Layer, 51 vias

## Nets (pads, with @x,y where several pads share a name; then routed paths per layer and width w, separated by ;. In a path a pad name is that pad's centre, name@x,y a point inside that pad or via, vN(x,y) a via of type N, cw(c..) or ccw(c..) an arc to the next point about the centre after c; other vN are vias at no path point)
-High: U3.4 U4.1 | length 26.8
  Top Layer w0.254: v1(150.622,102.641) 149.606,103.657 149.606,115.57 152.298,118.262 152.298,121.036 U3.4
  Bottom Layer w0.254: v1(150.622,102.641) 151.587,103.607 153.111,103.607 153.619,103.099 155.6,103.099 155.968,102.731 U4.1
-Low: U6.4
D+: J2.A6 MD1.14 | length 16.5
  Top Layer w0.254: J2.A6 143.823,103.116 151.841,95.098 151.841,92.329 MD1.14
D-: J2.A7 MD1.13 | length 19.9
  Top Layer w0.254: J2.A7 143.053,102.116 143.459,101.71 143.459,97.384 145.112,95.731 150.446,95.731 150.851,95.326 150.851,91.389 151.181,91.059 MD1.13
GND: C2.2 C3.2 C5.2 C6.2 C7.2 C8.2 C9.2 C10.2 C11.2 C12.2 C13.2 J3.3 MD1.1 MD1.15 MD1.38 MD1.39 R4.1 R6.1 U1.2 U2.2 U3.3 U4.4 U5.3 U6.3 U7.3 | length 92
  Top Layer w0.254: MD1.38 136.576,75.819 137.16,76.403 v1(137.16,82.296) ; v1(143.154,88.976) 143.065,88.976 MD1.39@143.065,85.166 ; MD1.39@144.9,81.484 MD1.39@146.735,81.484 ; MD1.39@144.9,83.319 146.735,83.319 146.735,85.154 146.733,85.156 146.714,85.156 146.712,85.154 144.9,85.154 144.018,85.154 144.006,85.166 MD1.39@143.065,85.166 ; MD1.39@146.736,81.485 MD1.39@146.736,83.318 ; v1(149.615,91.594) MD1.15 ; U3.3 v1(150.868,121.036) ; v1(150.665,75.819) MD1.1 ; C3.2 153.071,112.268 153.122,112.319 v1(154.024,112.319) ; C6.2 159.639,119.38 160.248,119.99 v1(160.248,120.701) ; C7.2 159.766,124.206 160.375,124.816 v1(160.375,125.324) ; C11.2 160.728,113.665 v1(161.058,113.995) ; C13.2 160.488,109.22 161.098,109.83 161.098,110.541 161.199,110.642 v1(162.317,110.642) ; v1(160.428,104.115) 160.835,104.521 U1.2 ; C2.2 162.346,98.258 164.592,96.012 v1(165.405,96.012) ; C5.2 163.306,92.404 164.168,91.542 168.453,91.542 168.692,91.781 168.692,93.423 v1(169.148,93.878) ; C9.2 164.893,119.38 ; C8.2 165.1,124.206 165.709,124.816 v1(165.709,125.324) ; C12.2 165.379,113.665 165.71,113.995 v1(166.471,113.995) ; v1(165.503,120.701) 165.503,119.99 164.893,119.38 ; v1(166.471,110.642) 165.421,110.642 164.507,109.728 C10.2 165.119,109.22 165.648,109.749 167.622,109.749 168.25,109.122 U7.3 ; U5.3 166.37,119.409 166.341,119.38 164.893,119.38 ; R4.1 170.928,123.89 v1(170.993,123.89) ; R6.1 170.993,114.065 v1(170.993,113.756) ; v1(170.93,93.443) 170.93,93.269 171.163,93.036 U2.2 ; MD1.39@143.065,83.319 MD1.39@143.065,85.154 ; MD1.39@143.065,83.319 143.065,81.484 142.147,82.401 MD1.39@143.065,83.319 ; MD1.39@143.065,83.319 143.053,83.331 143.053,85.142 MD1.39@143.065,85.154 ; MD1.39@143.065,85.154 MD1.39@143.065,85.166
  Bottom Layer w0.254: v1(146.317,104.46) U6.3 ; U4.4 157.323,101.231 v1(157.729,100.825)
High: U2.4 U3.2 | length 62.6
  Top Layer w0.254: U3.2 152.806,121.986 157.338,126.517 173.076,126.517 176.403,123.19 176.403,92.716 176.073,92.386 U2.4
Low: U1.4 U4.6 U6.2 | length 69.9
  Top Layer w0.254: U1.4 v1(167.056,103.871)
  Bottom Layer w0.254: U6.2 149.682,105.41 156.185,111.912 170.688,111.912 174.65,115.875 175.971,115.875 176.403,115.443 176.403,113.218 v1(167.056,103.871) 166.838,103.871 162.56,99.593 153.34,99.593 153.086,99.847 153.086,101.498 153.318,101.731 U4.6
NetC1_2: C1.2 C2.1 U1.3 | length 18.2
  Top Layer w0.254: U1.3 161.544,103.871 160.742,103.069 C2.1 160.742,98.628 164.425,94.945 165.837,94.945 166.802,95.91 166.802,98.893 C1.2
NetC4_2: C4.2 C5.1 U2.3 | length 17.5
  Top Layer w0.254: C5.1 160.956,93.472 162.226,94.742 163.754,94.742 164.008,94.488 166.751,94.488 167.767,93.472 ; C4.2 167.767,93.472 ; U2.3 170.688,92.386 170.068,93.006 170.068,94.285 169.611,94.742 168.224,94.742 167.767,94.285 167.767,93.472
NetC8_1: C8.1 R3.2 U5.7 | length 20.5
  Top Layer w0.254: C8.1 162.141,123.533 162.357,123.317 166.268,123.317 168.885,125.933 171.501,125.933 172.212,125.222 172.212,122.733 171.653,122.174 R3.2 171.221,121.114 171.221,120.294 170.786,119.859 U5.7
NetC9_1: C9.1 U5.6 | length 13.9
  Top Layer w0.254: C9.1 161.934,120.345 162.214,120.625 v1(163.728,120.625) ; U5.6 170.764,119.409 170.764,117.754 v1(170.536,117.526)
  Bottom Layer w0.254: v1(163.728,120.625) 167.234,117.119 170.129,117.119 v1(170.536,117.526)
NetC12_1: C12.1 R5.2 U7.7 | length 18.3
  Top Layer w0.254: C12.1 162.903,115.646 163.191,115.934 171.34,115.934 171.856,115.418 171.856,112.674 R5.2 171.272,111.176 171.272,109.572 U7.7
NetC13_1: C13.1 U7.6 | length 30.4
  Top Layer w0.254: C13.1 157.529,106.656 158.09,106.096 165.296,106.096 165.7,105.692 173.586,105.692 175.184,107.29 175.184,110.642 174.142,110.642 173.939,110.439 173.939,109.398 173.663,109.122 U7.6
NetL1_2: L1.2 U5.4 | length 10.6
  Top Layer w0.254: U5.4 168.326,118.959 168.326,117.856 169.54,116.642 171.094,116.642 171.421,116.969 171.421,119.301 171.907,119.786 173.977,119.786 L1.2
NetL2_2: L2.2 U7.4 | length 15.2
  Top Layer w0.254: v1(166.573,106.705) 173.99,106.705 174.612,107.327 L2.2 ; v1(166.573,108.672) U7.4
  Bottom Layer w0.254: v1(166.573,106.705) v1(166.573,108.672)
NetQ1_3: Q1.3 R1.2 | length 12
  Top Layer w0.254: R1.2 160.63,86.995 163.093,84.531 163.093,79.146 Q1.3
NetQ2_3: Q2.3 R2.2 | length 18.7
  Top Layer w0.254: R2.2 164.579,86.538 v1(164.922,86.538)
  Bottom Layer w0.254: Q2.3 155.169,79.146 155.169,81.305 155.651,81.788 163.322,81.788 164.922,83.388 v1(164.922,86.538)
NetR3_1: R3.1 R4.2 U5.8 | length 8.6
  Top Layer w0.254: R4.2 170.739,125.476 171.856,124.358 171.856,123.139 171.348,122.631 169.818,122.631 R3.1 169.951,121.584 169.951,120.309 U5.8
NetR5_1: R5.1 R6.2 U7.8 | length 7.3
  Top Layer w0.254: U7.8 170.612,110.022 170.612,111.036 R5.1 169.647,112.001 169.647,115.392 170.466,115.392 R6.2
NetR7_1: R7.1 U8.8 | length 24.9
  Top Layer w0.254: R7.1 142.387,119.817 143.713,118.491 143.713,105.623 v1(147.98,101.356)
  Bottom Layer w0.254: U8.8 146.66,100.035 v1(147.98,101.356)
NetR7_3: R7.3 U8.1 | length 25.5
  Top Layer w0.254: R7.3 144.887,108.935 148.946,104.877 v1(148.946,99.568)
  Bottom Layer w0.254: v1(148.946,99.568) 149.413,100.035 U8.1
nhigh: C6.1 Q1.1 U5.5 | length 61
  Top Layer w0.254: v1(155.626,121.996) 156.68,120.942 C6.1 156.591,119.38 156.591,87.501 156.806,87.287 156.806,86.298 160.045,83.058 Q1.1 ; v1(169.189,118.212) 169.824,118.847 169.824,118.959 U5.5
  Bottom Layer w0.254: v1(155.626,121.996) 168.3,121.996 169.189,121.107 v1(169.189,118.212)
nlow: C10.1 Q2.1 U7.5 | length 42.4
  Top Layer w0.254: v1(155.042,106.985) 155.88,106.147 155.88,87.147 156.337,86.69 Q2.1 ; v1(158.699,106.985) 161.785,106.985 162.903,108.102 162.903,108.547 ; C10.1 162.903,108.547 ; U7.5 170.459,108.672 169.483,107.696 163.754,107.696 162.903,108.547
  Bottom Layer w0.254: v1(155.042,106.985) v1(158.699,106.985)
shigh: C7.1 L1.1 MD1.27 U4.5 U4.7 U5.2 | length 94.6
  Top Layer w0.254: MD1.27 v1(141.554,89.789) ; C7.1 156.807,122.441 157.683,121.564 160.655,121.564 160.657,121.563 ; U5.2 167.618,119.859 165.914,121.563 160.657,121.563 ; v1(175.521,114.992) 172.657,117.856 ; 160.657,121.563 161.112,121.107 161.112,120.142 161.087,120.117 161.087,117.856 162.655,116.288 171.509,116.288 172.657,117.436 172.657,117.856 ; 172.657,117.856 172.55,117.963 L1.1 172.657,117.856
  Bottom Layer w0.254: v1(141.554,89.789) 148.082,96.317 148.082,99.974 148.66,100.552 151.407,100.552 153.086,102.231 U4.7 154.026,102.231 154.229,102.028 154.229,101.434 154.026,101.231 U4.5@153.695,101.231 ; U4.5 U4.5@153.695,101.231 ; v1(175.521,114.992) 175.521,114.396 161.074,99.949 154.534,99.949 153.695,100.787 U4.5@153.695,101.231
slow: C11.1 L2.1 U4.2 U4.3 U7.2 | length 52.9
  Top Layer w0.254: v1(157.489,116.002) C11.1 157.489,112.919 ; v1(159.969,110.439) 158.799,111.609 ; U7.2 168.453,109.572 168.25,109.775 168.25,110.592 167.232,111.609 158.799,111.609 ; v1(172.72,116.002) 173.292,115.43 L2.1 ; 157.489,112.919 157.489,112.547 158.427,111.609 158.799,111.609 ; 157.489,112.919 158.799,111.609
  Bottom Layer w0.254: U4.3 U4.2 158.975,102.231 159.566,102.823 159.566,110.036 v1(159.969,110.439) ; v1(157.489,116.002) v1(172.72,116.002)
VCC: C1.1 C4.1 J3.1 MD1.2 U1.5 U2.5 U3.5 U4.8 U6.5 U8.7 | length 26.3
  Top Layer w0.254: v1(151.148,122.936) U3.5 ; MD1.2 v1(154.135,77.089) ; v1(163.386,93.878) 164.86,92.404 C4.1 ; v1(163.984,99.72) 163.984,99.515 164.606,98.893 C1.1 ; U1.5 164.992,105.171 164.992,104.984 168.092,104.984 v1(169.291,103.784) ; v1(170.383,96.291) 171.704,96.291 173.711,94.285 173.711,93.686 U2.5
  Bottom Layer w0.254: U6.5 v1(146.037,106.36) ; U8.7 147.117,99.385 147.629,98.873 147.629,97.759 v1(146.816,96.947) ; v1(152.253,102.731) U4.8
Vin+: C3.1 J1.1 Q1.2 Q2.2 U8.3 | length 85.7
  Top Layer w0.254: C3.1 150.455,109.361 155.169,104.648 155.169,81.686 Q2.2
  Bottom Layer w0.254: U8.3 149.657,98.735 149.2,98.278 149.2,96.088 157.886,87.401 165.786,87.401 166.091,87.097 166.091,81.61 164.998,80.518 Q1.2 ; Q2.2 Q1.2 ; J1.1 164.512,77.931 Q1.2
Vin-: J1.2 R1.1 R2.1 U8.2 U8.4 | length 47.3
  Top Layer w0.254: R1.1 159.969,88.595 161.722,88.595 R2.1 163.195,86.873 167.137,82.931 J1.2
  Bottom Layer w0.254: U8.4 151.536,98.085 ; U8.2 151.313,99.385 151.536,99.162 151.536,98.085 ; J1.2 157.185,98.085 151.536,98.085
Vout: MD1.10 U1.1 U2.1 U8.6 | length 66.8
  Top Layer w0.254: MD1.10 153.619,87.249 153.924,87.554 v1(153.924,104.369) ; v1(158.293,103.962) 159.502,105.171 U1.1 163.043,105.171 163.043,105.639 165.045,105.639 165.346,105.338 169.287,105.338 170.155,104.47 170.155,97.638 169.52,97.003 169.52,95.91 170.332,95.098 171.069,95.098 171.882,94.285 171.882,93.686 U2.1
  Bottom Layer w0.254: U8.6 145.435,98.735 145.212,98.958 145.212,101.067 148.107,103.962 v1(158.293,103.962) 157.886,104.369 v1(153.924,104.369)
pads on no net: J2.1 J2.2 J2.3 J2.4 J2.A1 J2.A2 J2.A3 J2.A4 J2.A5 J2.A8 J2.A9 J2.A10 J2.A11 J2.A12 J2.B1 J2.B2 J2.B3 J2.B4 J2.B5 J2.B6 J2.B7 J2.B8 J2.B9 J2.B10 J2.B11 J2.B12 J3.2 MD1.3 MD1.4 MD1.5 MD1.6 MD1.7 MD1.8 MD1.9 MD1.11 MD1.12 MD1.16 MD1.17 MD1.18 MD1.19 MD1.20 MD1.21 MD1.22 MD1.23 MD1.24 MD1.25 MD1.26 MD1.28 MD1.29 MD1.30 MD1.31 MD1.32 MD1.33 MD1.34 MD1.35 MD1.36 MD1.37 R7.2 U3.1 U5.1 U5.9 U6.1 U7.1 U7.9 U8.5

## Polygon pours and split planes (outlines as drawn)
GND on Layer 1 (split plane): 176.909,74.297 134.108,74.297 133.611,126.363 176.909,126.363
VCC on Layer 2 (split plane): 176.909,74.297 134.108,74.297 133.611,126.363 176.909,126.363

## Silkscreen, mask and mechanical layers (free items; w line width, h text height)
Top Overlay:
  text "+" at 166.751,82.804 h1.52
  text "-" at 166.497,77.343 h1.52